# EAGLE board IOB-Adapter-Minimal_array (EAGLE 7.7.0)
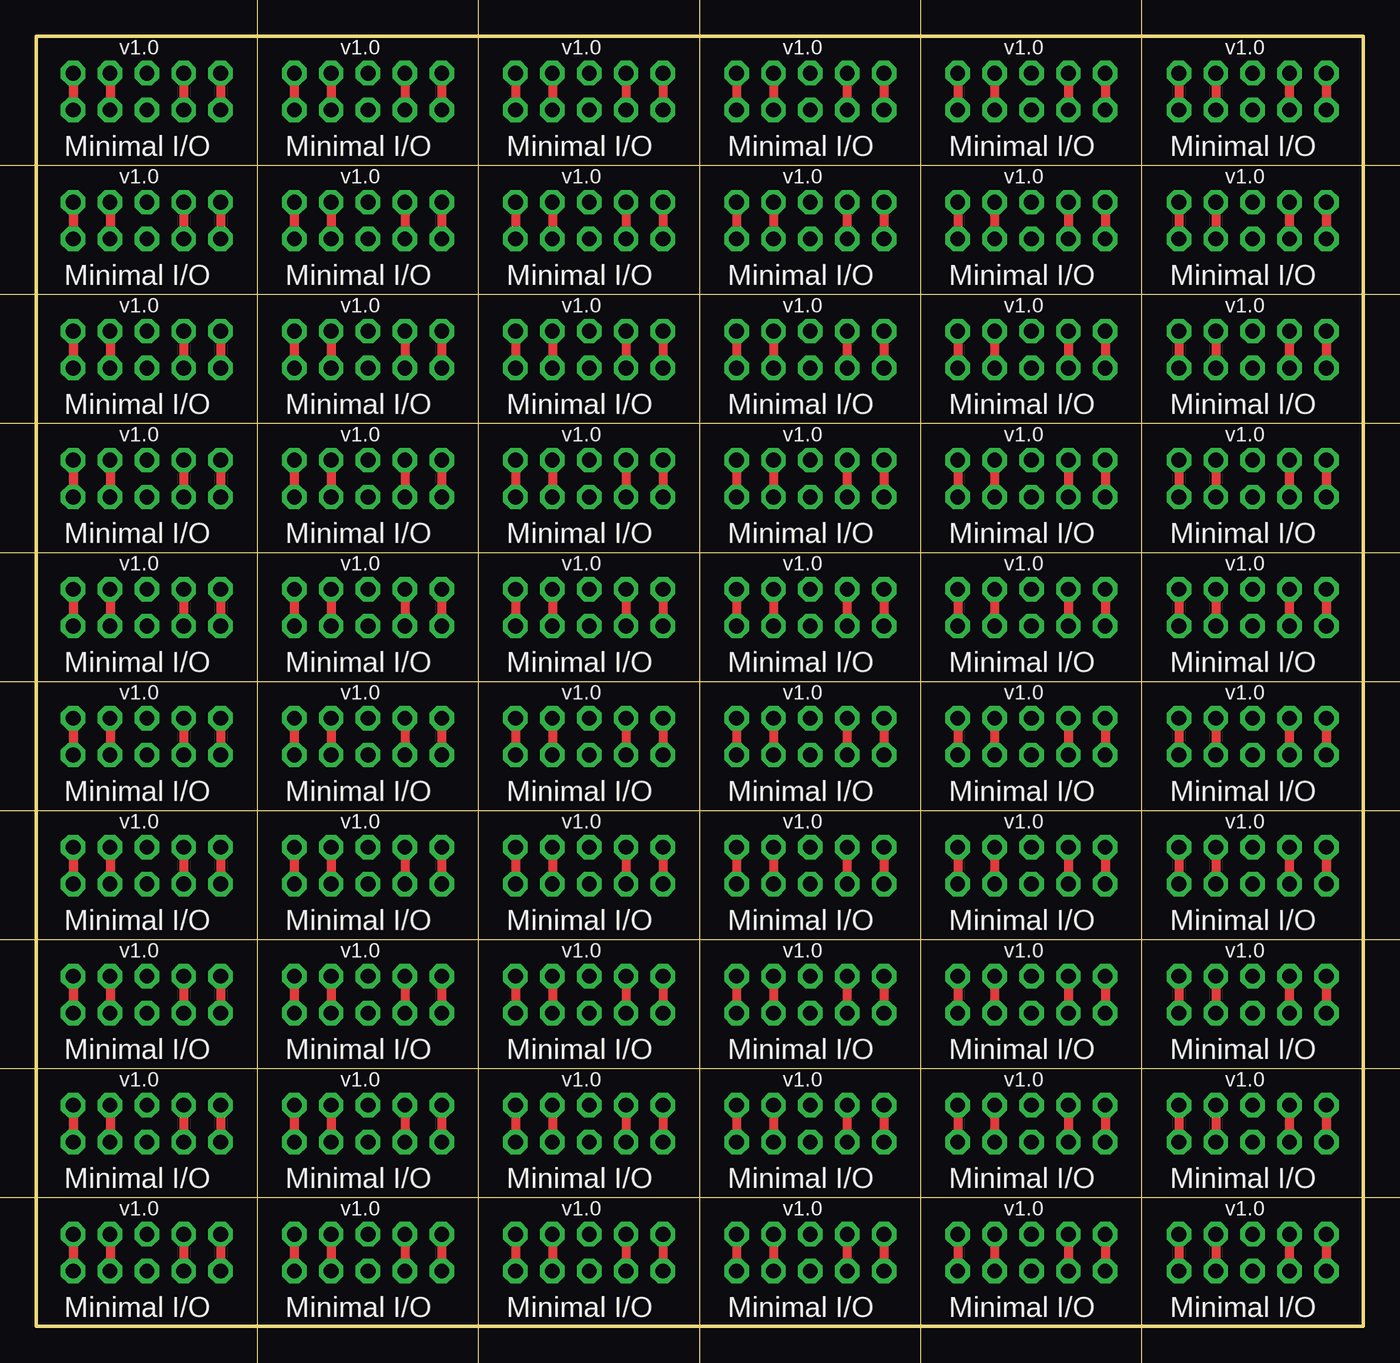
[diagram p0: board, top side]
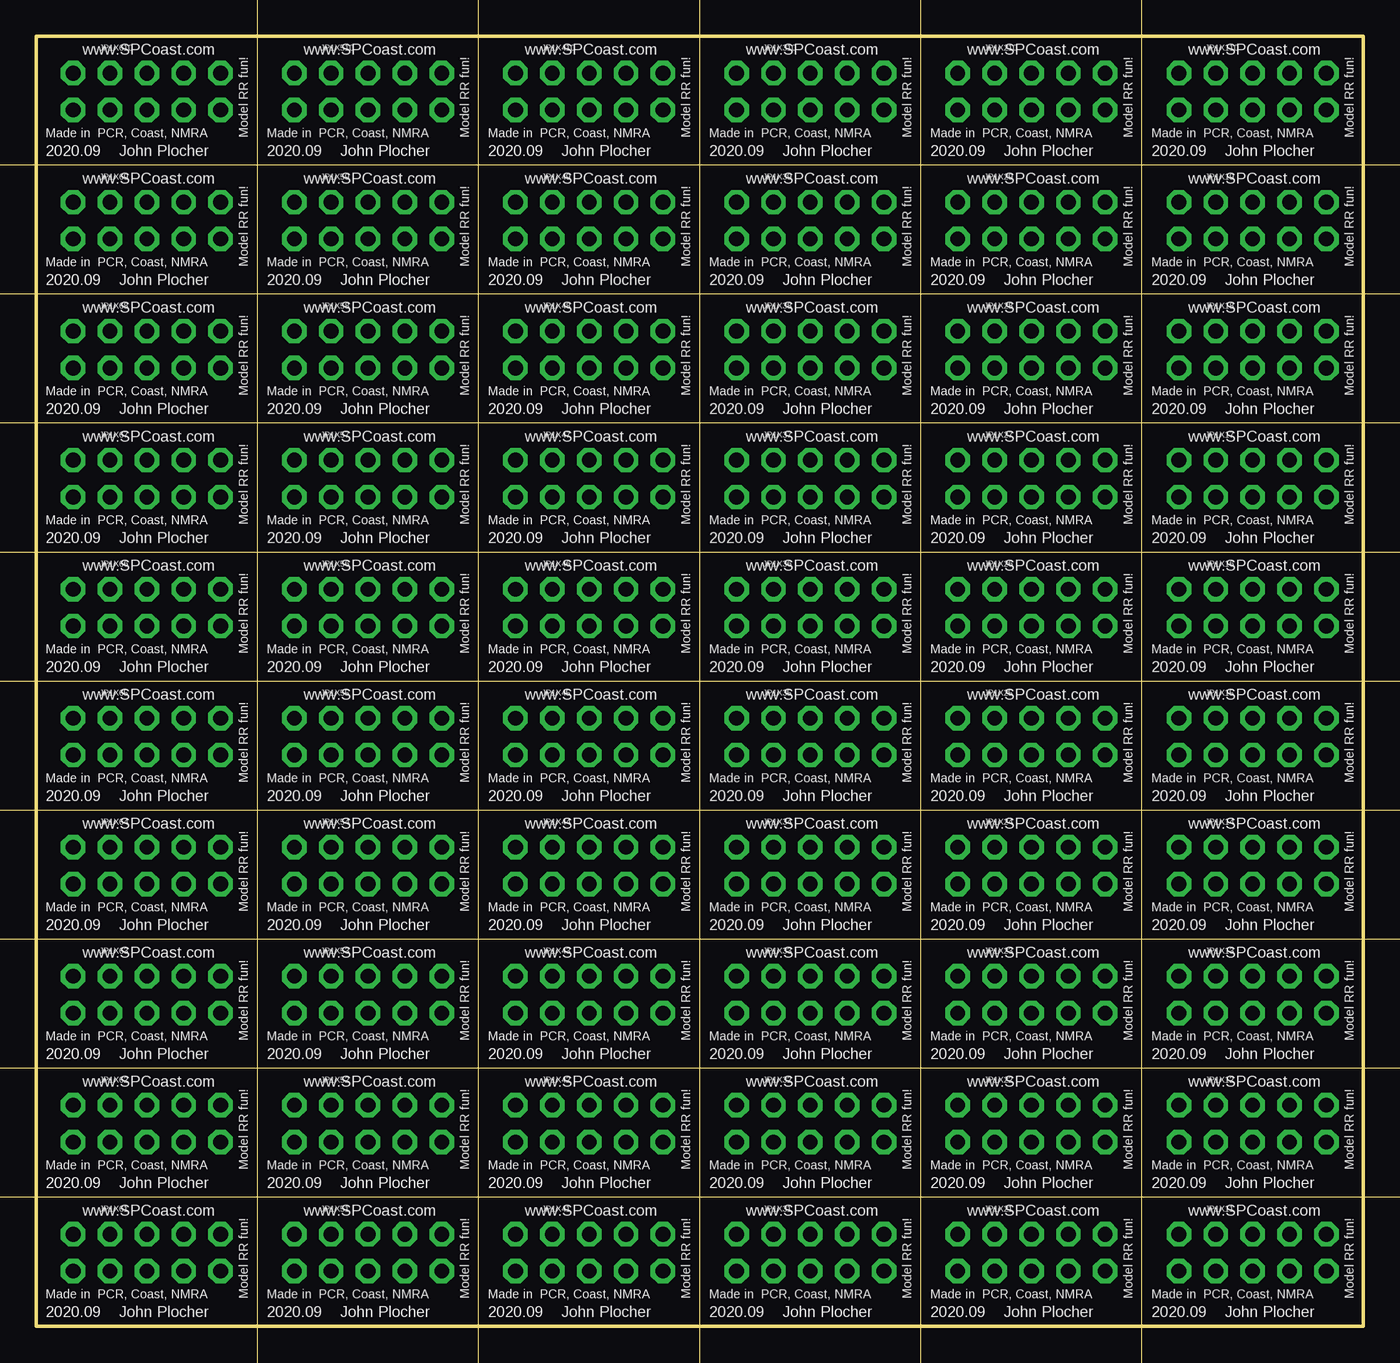
[diagram p1: board, bottom side, seen from below]

Size 91.44 x 88.9 mm. Coordinates in mm from the lower left corner, seen from the top.
Outline: 0,0 91.44,0 91.44,88.9 0,88.9 0,0
Copper layers (1*16): Top 0.035mm / dielectric 1.5mm / Bottom 0.035mm
Design rules "default": minimum track width 10mil, minimum drill 0.6mm, track to track 8mil, track to pad 8mil, pad to pad 8mil, via to via 8mil, smd to smd 8mil, copper to edge 40mil, drill to drill 8mil, minimum pad ring 10mil, minimum via ring 8mil, stop-mask expansion 4mil, vias tented up to drill 0mil, thermal gap 10mil
Milling: 14 lines

## Footprints (pad centres in the part's own frame; a part is rotated, then mirrored left to right if it is on the bottom)
2X5_NOSILK = drill 1.016 pad 1.676 octagon: 1 -1.27,5.08; 2 1.27,5.08; 3 -1.27,2.54; 4 1.27,2.54; 5 -1.27,0; 6 1.27,0; 7 -1.27,-2.54; 8 1.27,-2.54; 9 -1.27,-5.08; 10 1.27,-5.08

## Placement (x,y rotation side)
JP1X11  0.100  [2X5_NOSILK]  7.62,5.08 270 bottom
JP1X12  0.100  [2X5_NOSILK]  7.62,13.97 270 bottom
JP1X13  0.100  [2X5_NOSILK]  7.62,22.86 270 bottom
JP1X14  0.100  [2X5_NOSILK]  7.62,31.75 270 bottom
JP1X15  0.100  [2X5_NOSILK]  7.62,40.64 270 bottom
JP1X16  0.100  [2X5_NOSILK]  7.62,49.53 270 bottom
JP1X17  0.100  [2X5_NOSILK]  7.62,58.42 270 bottom
JP1X18  0.100  [2X5_NOSILK]  7.62,67.31 270 bottom
JP1X19  0.100  [2X5_NOSILK]  7.62,76.2 270 bottom
JP1X21  0.100  [2X5_NOSILK]  22.86,5.08 270 bottom
JP1X22  0.100  [2X5_NOSILK]  22.86,13.97 270 bottom
JP1X23  0.100  [2X5_NOSILK]  22.86,22.86 270 bottom
JP1X24  0.100  [2X5_NOSILK]  22.86,31.75 270 bottom
JP1X25  0.100  [2X5_NOSILK]  22.86,40.64 270 bottom
JP1X26  0.100  [2X5_NOSILK]  22.86,49.53 270 bottom
JP1X27  0.100  [2X5_NOSILK]  22.86,58.42 270 bottom
JP1X28  0.100  [2X5_NOSILK]  22.86,67.31 270 bottom
JP1X29  0.100  [2X5_NOSILK]  22.86,76.2 270 bottom
JP1X31  0.100  [2X5_NOSILK]  38.1,5.08 270 bottom
JP1X32  0.100  [2X5_NOSILK]  38.1,13.97 270 bottom
JP1X33  0.100  [2X5_NOSILK]  38.1,22.86 270 bottom
JP1X34  0.100  [2X5_NOSILK]  38.1,31.75 270 bottom
JP1X35  0.100  [2X5_NOSILK]  38.1,40.64 270 bottom
JP1X36  0.100  [2X5_NOSILK]  38.1,49.53 270 bottom
JP1X37  0.100  [2X5_NOSILK]  38.1,58.42 270 bottom
JP1X38  0.100  [2X5_NOSILK]  38.1,67.31 270 bottom
JP1X39  0.100  [2X5_NOSILK]  38.1,76.2 270 bottom
JP1X41  0.100  [2X5_NOSILK]  53.34,5.08 270 bottom
JP1X42  0.100  [2X5_NOSILK]  53.34,13.97 270 bottom
JP1X43  0.100  [2X5_NOSILK]  53.34,22.86 270 bottom
JP1X44  0.100  [2X5_NOSILK]  53.34,31.75 270 bottom
JP1X45  0.100  [2X5_NOSILK]  53.34,40.64 270 bottom
JP1X46  0.100  [2X5_NOSILK]  53.34,49.53 270 bottom
JP1X47  0.100  [2X5_NOSILK]  53.34,58.42 270 bottom
JP1X48  0.100  [2X5_NOSILK]  53.34,67.31 270 bottom
JP1X49  0.100  [2X5_NOSILK]  53.34,76.2 270 bottom
JP1X51  0.100  [2X5_NOSILK]  68.58,5.08 270 bottom
JP1X52  0.100  [2X5_NOSILK]  68.58,13.97 270 bottom
JP1X53  0.100  [2X5_NOSILK]  68.58,22.86 270 bottom
JP1X54  0.100  [2X5_NOSILK]  68.58,31.75 270 bottom
JP1X55  0.100  [2X5_NOSILK]  68.58,40.64 270 bottom
JP1X56  0.100  [2X5_NOSILK]  68.58,49.53 270 bottom
JP1X57  0.100  [2X5_NOSILK]  68.58,58.42 270 bottom
JP1X58  0.100  [2X5_NOSILK]  68.58,67.31 270 bottom
JP1X59  0.100  [2X5_NOSILK]  68.58,76.2 270 bottom
JP1X61  0.100  [2X5_NOSILK]  83.82,5.08 270 bottom
JP1X62  0.100  [2X5_NOSILK]  83.82,13.97 270 bottom
JP1X63  0.100  [2X5_NOSILK]  83.82,22.86 270 bottom
JP1X64  0.100  [2X5_NOSILK]  83.82,31.75 270 bottom
JP1X65  0.100  [2X5_NOSILK]  83.82,40.64 270 bottom
JP1X66  0.100  [2X5_NOSILK]  83.82,49.53 270 bottom
JP1X67  0.100  [2X5_NOSILK]  83.82,58.42 270 bottom
JP1X68  0.100  [2X5_NOSILK]  83.82,67.31 270 bottom
JP1X69  0.100  [2X5_NOSILK]  83.82,76.2 270 bottom
JP1X110  0.100  [2X5_NOSILK]  7.62,85.09 270 bottom
JP1X210  0.100  [2X5_NOSILK]  22.86,85.09 270 bottom
JP1X310  0.100  [2X5_NOSILK]  38.1,85.09 270 bottom
JP1X410  0.100  [2X5_NOSILK]  53.34,85.09 270 bottom
JP1X510  0.100  [2X5_NOSILK]  68.58,85.09 270 bottom
JP1X610  0.100  [2X5_NOSILK]  83.82,85.09 270 bottom

## Library data of the parts
JP1X11-JP1X19 JP1X21-JP1X29 JP1X31-JP1X39 JP1X41-JP1X49 JP1X51-JP1X59 JP1X61-JP1X69 JP1X110 JP1X210 JP1X310 JP1X410 JP1X510 JP1X610 = SPCoast

## Nets
N$1X11: JP1X11.1 JP1X11.2
N$1X12: JP1X12.1 JP1X12.2
N$1X13: JP1X13.1 JP1X13.2
N$1X14: JP1X14.1 JP1X14.2
N$1X15: JP1X15.1 JP1X15.2
N$1X16: JP1X16.1 JP1X16.2
N$1X17: JP1X17.1 JP1X17.2
N$1X18: JP1X18.1 JP1X18.2
N$1X19: JP1X19.1 JP1X19.2
N$1X21: JP1X21.1 JP1X21.2
N$1X22: JP1X22.1 JP1X22.2
N$1X23: JP1X23.1 JP1X23.2
N$1X24: JP1X24.1 JP1X24.2
N$1X25: JP1X25.1 JP1X25.2
N$1X26: JP1X26.1 JP1X26.2
N$1X27: JP1X27.1 JP1X27.2
N$1X28: JP1X28.1 JP1X28.2
N$1X29: JP1X29.1 JP1X29.2
N$1X31: JP1X31.1 JP1X31.2
N$1X32: JP1X32.1 JP1X32.2
N$1X33: JP1X33.1 JP1X33.2
N$1X34: JP1X34.1 JP1X34.2
N$1X35: JP1X35.1 JP1X35.2
N$1X36: JP1X36.1 JP1X36.2
N$1X37: JP1X37.1 JP1X37.2
N$1X38: JP1X38.1 JP1X38.2
N$1X39: JP1X39.1 JP1X39.2
N$1X41: JP1X41.1 JP1X41.2
N$1X42: JP1X42.1 JP1X42.2
N$1X43: JP1X43.1 JP1X43.2
N$1X44: JP1X44.1 JP1X44.2
N$1X45: JP1X45.1 JP1X45.2
N$1X46: JP1X46.1 JP1X46.2
N$1X47: JP1X47.1 JP1X47.2
N$1X48: JP1X48.1 JP1X48.2
N$1X49: JP1X49.1 JP1X49.2
N$1X51: JP1X51.1 JP1X51.2
N$1X52: JP1X52.1 JP1X52.2
N$1X53: JP1X53.1 JP1X53.2
N$1X54: JP1X54.1 JP1X54.2
N$1X55: JP1X55.1 JP1X55.2
N$1X56: JP1X56.1 JP1X56.2
N$1X57: JP1X57.1 JP1X57.2
N$1X58: JP1X58.1 JP1X58.2
N$1X59: JP1X59.1 JP1X59.2
N$1X61: JP1X61.1 JP1X61.2
N$1X62: JP1X62.1 JP1X62.2
N$1X63: JP1X63.1 JP1X63.2
N$1X64: JP1X64.1 JP1X64.2
N$1X65: JP1X65.1 JP1X65.2
N$1X66: JP1X66.1 JP1X66.2
N$1X67: JP1X67.1 JP1X67.2
N$1X68: JP1X68.1 JP1X68.2
N$1X69: JP1X69.1 JP1X69.2
N$1X110: JP1X110.1 JP1X110.2
N$1X210: JP1X210.1 JP1X210.2
N$1X310: JP1X310.1 JP1X310.2
N$1X410: JP1X410.1 JP1X410.2
N$1X510: JP1X510.1 JP1X510.2
N$1X610: JP1X610.1 JP1X610.2
N$2X11: JP1X11.3 JP1X11.4
N$2X12: JP1X12.3 JP1X12.4
N$2X13: JP1X13.3 JP1X13.4
N$2X14: JP1X14.3 JP1X14.4
N$2X15: JP1X15.3 JP1X15.4
N$2X16: JP1X16.3 JP1X16.4
N$2X17: JP1X17.3 JP1X17.4
N$2X18: JP1X18.3 JP1X18.4
N$2X19: JP1X19.3 JP1X19.4
N$2X21: JP1X21.3 JP1X21.4
N$2X22: JP1X22.3 JP1X22.4
N$2X23: JP1X23.3 JP1X23.4
N$2X24: JP1X24.3 JP1X24.4
N$2X25: JP1X25.3 JP1X25.4
N$2X26: JP1X26.3 JP1X26.4
N$2X27: JP1X27.3 JP1X27.4
N$2X28: JP1X28.3 JP1X28.4
N$2X29: JP1X29.3 JP1X29.4
N$2X31: JP1X31.3 JP1X31.4
N$2X32: JP1X32.3 JP1X32.4
N$2X33: JP1X33.3 JP1X33.4
N$2X34: JP1X34.3 JP1X34.4
N$2X35: JP1X35.3 JP1X35.4
N$2X36: JP1X36.3 JP1X36.4
N$2X37: JP1X37.3 JP1X37.4
N$2X38: JP1X38.3 JP1X38.4
N$2X39: JP1X39.3 JP1X39.4
N$2X41: JP1X41.3 JP1X41.4
N$2X42: JP1X42.3 JP1X42.4
N$2X43: JP1X43.3 JP1X43.4
N$2X44: JP1X44.3 JP1X44.4
N$2X45: JP1X45.3 JP1X45.4
N$2X46: JP1X46.3 JP1X46.4
N$2X47: JP1X47.3 JP1X47.4
N$2X48: JP1X48.3 JP1X48.4
N$2X49: JP1X49.3 JP1X49.4
N$2X51: JP1X51.3 JP1X51.4
N$2X52: JP1X52.3 JP1X52.4
N$2X53: JP1X53.3 JP1X53.4
N$2X54: JP1X54.3 JP1X54.4
N$2X55: JP1X55.3 JP1X55.4
N$2X56: JP1X56.3 JP1X56.4
N$2X57: JP1X57.3 JP1X57.4
N$2X58: JP1X58.3 JP1X58.4
N$2X59: JP1X59.3 JP1X59.4
N$2X61: JP1X61.3 JP1X61.4
N$2X62: JP1X62.3 JP1X62.4
N$2X63: JP1X63.3 JP1X63.4
N$2X64: JP1X64.3 JP1X64.4
N$2X65: JP1X65.3 JP1X65.4
N$2X66: JP1X66.3 JP1X66.4
N$2X67: JP1X67.3 JP1X67.4
N$2X68: JP1X68.3 JP1X68.4
N$2X69: JP1X69.3 JP1X69.4
N$2X110: JP1X110.3 JP1X110.4
N$2X210: JP1X210.3 JP1X210.4
N$2X310: JP1X310.3 JP1X310.4
N$2X410: JP1X410.3 JP1X410.4
N$2X510: JP1X510.3 JP1X510.4
N$2X610: JP1X610.3 JP1X610.4
N$4X11: JP1X11.7 JP1X11.8
N$4X12: JP1X12.7 JP1X12.8
N$4X13: JP1X13.7 JP1X13.8
N$4X14: JP1X14.7 JP1X14.8
N$4X15: JP1X15.7 JP1X15.8
N$4X16: JP1X16.7 JP1X16.8
N$4X17: JP1X17.7 JP1X17.8
N$4X18: JP1X18.7 JP1X18.8
N$4X19: JP1X19.7 JP1X19.8
N$4X21: JP1X21.7 JP1X21.8
N$4X22: JP1X22.7 JP1X22.8
N$4X23: JP1X23.7 JP1X23.8
N$4X24: JP1X24.7 JP1X24.8
N$4X25: JP1X25.7 JP1X25.8
N$4X26: JP1X26.7 JP1X26.8
N$4X27: JP1X27.7 JP1X27.8
N$4X28: JP1X28.7 JP1X28.8
N$4X29: JP1X29.7 JP1X29.8
N$4X31: JP1X31.7 JP1X31.8
N$4X32: JP1X32.7 JP1X32.8
N$4X33: JP1X33.7 JP1X33.8
N$4X34: JP1X34.7 JP1X34.8
N$4X35: JP1X35.7 JP1X35.8
N$4X36: JP1X36.7 JP1X36.8
N$4X37: JP1X37.7 JP1X37.8
N$4X38: JP1X38.7 JP1X38.8
N$4X39: JP1X39.7 JP1X39.8
N$4X41: JP1X41.7 JP1X41.8
N$4X42: JP1X42.7 JP1X42.8
N$4X43: JP1X43.7 JP1X43.8
N$4X44: JP1X44.7 JP1X44.8
N$4X45: JP1X45.7 JP1X45.8
N$4X46: JP1X46.7 JP1X46.8
N$4X47: JP1X47.7 JP1X47.8
N$4X48: JP1X48.7 JP1X48.8
N$4X49: JP1X49.7 JP1X49.8
N$4X51: JP1X51.7 JP1X51.8
N$4X52: JP1X52.7 JP1X52.8
N$4X53: JP1X53.7 JP1X53.8
N$4X54: JP1X54.7 JP1X54.8
N$4X55: JP1X55.7 JP1X55.8
N$4X56: JP1X56.7 JP1X56.8
N$4X57: JP1X57.7 JP1X57.8
N$4X58: JP1X58.7 JP1X58.8
N$4X59: JP1X59.7 JP1X59.8
N$4X61: JP1X61.7 JP1X61.8
N$4X62: JP1X62.7 JP1X62.8
N$4X63: JP1X63.7 JP1X63.8
N$4X64: JP1X64.7 JP1X64.8
N$4X65: JP1X65.7 JP1X65.8
N$4X66: JP1X66.7 JP1X66.8
N$4X67: JP1X67.7 JP1X67.8
N$4X68: JP1X68.7 JP1X68.8
N$4X69: JP1X69.7 JP1X69.8
N$4X110: JP1X110.7 JP1X110.8
N$4X210: JP1X210.7 JP1X210.8
N$4X310: JP1X310.7 JP1X310.8
N$4X410: JP1X410.7 JP1X410.8
N$4X510: JP1X510.7 JP1X510.8
N$4X610: JP1X610.7 JP1X610.8
N$5X11: JP1X11.9 JP1X11.10
N$5X12: JP1X12.9 JP1X12.10
N$5X13: JP1X13.9 JP1X13.10
N$5X14: JP1X14.9 JP1X14.10
N$5X15: JP1X15.9 JP1X15.10
N$5X16: JP1X16.9 JP1X16.10
N$5X17: JP1X17.9 JP1X17.10
N$5X18: JP1X18.9 JP1X18.10
N$5X19: JP1X19.9 JP1X19.10
N$5X21: JP1X21.9 JP1X21.10
N$5X22: JP1X22.9 JP1X22.10
N$5X23: JP1X23.9 JP1X23.10
N$5X24: JP1X24.9 JP1X24.10
N$5X25: JP1X25.9 JP1X25.10
N$5X26: JP1X26.9 JP1X26.10
N$5X27: JP1X27.9 JP1X27.10
N$5X28: JP1X28.9 JP1X28.10
N$5X29: JP1X29.9 JP1X29.10
N$5X31: JP1X31.9 JP1X31.10
N$5X32: JP1X32.9 JP1X32.10
N$5X33: JP1X33.9 JP1X33.10
N$5X34: JP1X34.9 JP1X34.10
N$5X35: JP1X35.9 JP1X35.10
N$5X36: JP1X36.9 JP1X36.10
N$5X37: JP1X37.9 JP1X37.10
N$5X38: JP1X38.9 JP1X38.10
N$5X39: JP1X39.9 JP1X39.10
N$5X41: JP1X41.9 JP1X41.10
N$5X42: JP1X42.9 JP1X42.10
N$5X43: JP1X43.9 JP1X43.10
N$5X44: JP1X44.9 JP1X44.10
N$5X45: JP1X45.9 JP1X45.10
N$5X46: JP1X46.9 JP1X46.10
N$5X47: JP1X47.9 JP1X47.10
N$5X48: JP1X48.9 JP1X48.10
N$5X49: JP1X49.9 JP1X49.10
N$5X51: JP1X51.9 JP1X51.10
N$5X52: JP1X52.9 JP1X52.10
N$5X53: JP1X53.9 JP1X53.10
N$5X54: JP1X54.9 JP1X54.10
N$5X55: JP1X55.9 JP1X55.10
N$5X56: JP1X56.9 JP1X56.10
N$5X57: JP1X57.9 JP1X57.10
N$5X58: JP1X58.9 JP1X58.10
N$5X59: JP1X59.9 JP1X59.10
N$5X61: JP1X61.9 JP1X61.10
N$5X62: JP1X62.9 JP1X62.10
N$5X63: JP1X63.9 JP1X63.10
N$5X64: JP1X64.9 JP1X64.10
N$5X65: JP1X65.9 JP1X65.10
N$5X66: JP1X66.9 JP1X66.10
N$5X67: JP1X67.9 JP1X67.10
N$5X68: JP1X68.9 JP1X68.10
N$5X69: JP1X69.9 JP1X69.10
N$5X110: JP1X110.9 JP1X110.10
N$5X210: JP1X210.9 JP1X210.10
N$5X310: JP1X310.9 JP1X310.10
N$5X410: JP1X410.9 JP1X410.10
N$5X510: JP1X510.9 JP1X510.10
N$5X610: JP1X610.9 JP1X610.10

## Tracks (layer width: path | path; a pad name or v marks a point on that pad's centre or on a via)
N$1X11
  Top 0.61: JP1X11.1 JP1X11.2
N$1X12
  Top 0.61: JP1X12.1 JP1X12.2
N$1X13
  Top 0.61: JP1X13.1 JP1X13.2
N$1X14
  Top 0.61: JP1X14.1 JP1X14.2
N$1X15
  Top 0.61: JP1X15.1 JP1X15.2
N$1X16
  Top 0.61: JP1X16.1 JP1X16.2
N$1X17
  Top 0.61: JP1X17.1 JP1X17.2
N$1X18
  Top 0.61: JP1X18.1 JP1X18.2
N$1X19
  Top 0.61: JP1X19.1 JP1X19.2
N$1X21
  Top 0.61: JP1X21.1 JP1X21.2
N$1X22
  Top 0.61: JP1X22.1 JP1X22.2
N$1X23
  Top 0.61: JP1X23.1 JP1X23.2
N$1X24
  Top 0.61: JP1X24.1 JP1X24.2
N$1X25
  Top 0.61: JP1X25.1 JP1X25.2
N$1X26
  Top 0.61: JP1X26.1 JP1X26.2
N$1X27
  Top 0.61: JP1X27.1 JP1X27.2
N$1X28
  Top 0.61: JP1X28.1 JP1X28.2
N$1X29
  Top 0.61: JP1X29.1 JP1X29.2
N$1X31
  Top 0.61: JP1X31.1 JP1X31.2
N$1X32
  Top 0.61: JP1X32.1 JP1X32.2
N$1X33
  Top 0.61: JP1X33.1 JP1X33.2
N$1X34
  Top 0.61: JP1X34.1 JP1X34.2
N$1X35
  Top 0.61: JP1X35.1 JP1X35.2
N$1X36
  Top 0.61: JP1X36.1 JP1X36.2
N$1X37
  Top 0.61: JP1X37.1 JP1X37.2
N$1X38
  Top 0.61: JP1X38.1 JP1X38.2
N$1X39
  Top 0.61: JP1X39.1 JP1X39.2
N$1X41
  Top 0.61: JP1X41.1 JP1X41.2
N$1X42
  Top 0.61: JP1X42.1 JP1X42.2
N$1X43
  Top 0.61: JP1X43.1 JP1X43.2
N$1X44
  Top 0.61: JP1X44.1 JP1X44.2
N$1X45
  Top 0.61: JP1X45.1 JP1X45.2
N$1X46
  Top 0.61: JP1X46.1 JP1X46.2
N$1X47
  Top 0.61: JP1X47.1 JP1X47.2
N$1X48
  Top 0.61: JP1X48.1 JP1X48.2
N$1X49
  Top 0.61: JP1X49.1 JP1X49.2
N$1X51
  Top 0.61: JP1X51.1 JP1X51.2
N$1X52
  Top 0.61: JP1X52.1 JP1X52.2
N$1X53
  Top 0.61: JP1X53.1 JP1X53.2
N$1X54
  Top 0.61: JP1X54.1 JP1X54.2
N$1X55
  Top 0.61: JP1X55.1 JP1X55.2
N$1X56
  Top 0.61: JP1X56.1 JP1X56.2
N$1X57
  Top 0.61: JP1X57.1 JP1X57.2
N$1X58
  Top 0.61: JP1X58.1 JP1X58.2
N$1X59
  Top 0.61: JP1X59.1 JP1X59.2
N$1X61
  Top 0.61: JP1X61.1 JP1X61.2
N$1X62
  Top 0.61: JP1X62.1 JP1X62.2
N$1X63
  Top 0.61: JP1X63.1 JP1X63.2
N$1X64
  Top 0.61: JP1X64.1 JP1X64.2
N$1X65
  Top 0.61: JP1X65.1 JP1X65.2
N$1X66
  Top 0.61: JP1X66.1 JP1X66.2
N$1X67
  Top 0.61: JP1X67.1 JP1X67.2
N$1X68
  Top 0.61: JP1X68.1 JP1X68.2
N$1X69
  Top 0.61: JP1X69.1 JP1X69.2
N$1X110
  Top 0.61: JP1X110.1 JP1X110.2
N$1X210
  Top 0.61: JP1X210.1 JP1X210.2
N$1X310
  Top 0.61: JP1X310.1 JP1X310.2
N$1X410
  Top 0.61: JP1X410.1 JP1X410.2
N$1X510
  Top 0.61: JP1X510.1 JP1X510.2
N$1X610
  Top 0.61: JP1X610.1 JP1X610.2
N$2X11
  Top 0.61: JP1X11.3 JP1X11.4
N$2X12
  Top 0.61: JP1X12.3 JP1X12.4
N$2X13
  Top 0.61: JP1X13.3 JP1X13.4
N$2X14
  Top 0.61: JP1X14.3 JP1X14.4
N$2X15
  Top 0.61: JP1X15.3 JP1X15.4
N$2X16
  Top 0.61: JP1X16.3 JP1X16.4
N$2X17
  Top 0.61: JP1X17.3 JP1X17.4
N$2X18
  Top 0.61: JP1X18.3 JP1X18.4
N$2X19
  Top 0.61: JP1X19.3 JP1X19.4
N$2X21
  Top 0.61: JP1X21.3 JP1X21.4
N$2X22
  Top 0.61: JP1X22.3 JP1X22.4
N$2X23
  Top 0.61: JP1X23.3 JP1X23.4
N$2X24
  Top 0.61: JP1X24.3 JP1X24.4
N$2X25
  Top 0.61: JP1X25.3 JP1X25.4
N$2X26
  Top 0.61: JP1X26.3 JP1X26.4
N$2X27
  Top 0.61: JP1X27.3 JP1X27.4
N$2X28
  Top 0.61: JP1X28.3 JP1X28.4
N$2X29
  Top 0.61: JP1X29.3 JP1X29.4
N$2X31
  Top 0.61: JP1X31.3 JP1X31.4
N$2X32
  Top 0.61: JP1X32.3 JP1X32.4
N$2X33
  Top 0.61: JP1X33.3 JP1X33.4
N$2X34
  Top 0.61: JP1X34.3 JP1X34.4
N$2X35
  Top 0.61: JP1X35.3 JP1X35.4
N$2X36
  Top 0.61: JP1X36.3 JP1X36.4
N$2X37
  Top 0.61: JP1X37.3 JP1X37.4
N$2X38
  Top 0.61: JP1X38.3 JP1X38.4
N$2X39
  Top 0.61: JP1X39.3 JP1X39.4
N$2X41
  Top 0.61: JP1X41.3 JP1X41.4
N$2X42
  Top 0.61: JP1X42.3 JP1X42.4
N$2X43
  Top 0.61: JP1X43.3 JP1X43.4
N$2X44
  Top 0.61: JP1X44.3 JP1X44.4
N$2X45
  Top 0.61: JP1X45.3 JP1X45.4
N$2X46
  Top 0.61: JP1X46.3 JP1X46.4
N$2X47
  Top 0.61: JP1X47.3 JP1X47.4
N$2X48
  Top 0.61: JP1X48.3 JP1X48.4
N$2X49
  Top 0.61: JP1X49.3 JP1X49.4
N$2X51
  Top 0.61: JP1X51.3 JP1X51.4
N$2X52
  Top 0.61: JP1X52.3 JP1X52.4
N$2X53
  Top 0.61: JP1X53.3 JP1X53.4
N$2X54
  Top 0.61: JP1X54.3 JP1X54.4
N$2X55
  Top 0.61: JP1X55.3 JP1X55.4
N$2X56
  Top 0.61: JP1X56.3 JP1X56.4
N$2X57
  Top 0.61: JP1X57.3 JP1X57.4
N$2X58
  Top 0.61: JP1X58.3 JP1X58.4
N$2X59
  Top 0.61: JP1X59.3 JP1X59.4
N$2X61
  Top 0.61: JP1X61.3 JP1X61.4
N$2X62
  Top 0.61: JP1X62.3 JP1X62.4
N$2X63
  Top 0.61: JP1X63.3 JP1X63.4
N$2X64
  Top 0.61: JP1X64.3 JP1X64.4
N$2X65
  Top 0.61: JP1X65.3 JP1X65.4
N$2X66
  Top 0.61: JP1X66.3 JP1X66.4
N$2X67
  Top 0.61: JP1X67.3 JP1X67.4
N$2X68
  Top 0.61: JP1X68.3 JP1X68.4
N$2X69
  Top 0.61: JP1X69.3 JP1X69.4
N$2X110
  Top 0.61: JP1X110.3 JP1X110.4
N$2X210
  Top 0.61: JP1X210.3 JP1X210.4
N$2X310
  Top 0.61: JP1X310.3 JP1X310.4
N$2X410
  Top 0.61: JP1X410.3 JP1X410.4
N$2X510
  Top 0.61: JP1X510.3 JP1X510.4
N$2X610
  Top 0.61: JP1X610.3 JP1X610.4
N$4X11
  Top 0.61: JP1X11.7 JP1X11.8
N$4X12
  Top 0.61: JP1X12.7 JP1X12.8
N$4X13
  Top 0.61: JP1X13.7 JP1X13.8
N$4X14
  Top 0.61: JP1X14.7 JP1X14.8
N$4X15
  Top 0.61: JP1X15.7 JP1X15.8
N$4X16
  Top 0.61: JP1X16.7 JP1X16.8
N$4X17
  Top 0.61: JP1X17.7 JP1X17.8
N$4X18
  Top 0.61: JP1X18.7 JP1X18.8
N$4X19
  Top 0.61: JP1X19.7 JP1X19.8
N$4X21
  Top 0.61: JP1X21.7 JP1X21.8
N$4X22
  Top 0.61: JP1X22.7 JP1X22.8
N$4X23
  Top 0.61: JP1X23.7 JP1X23.8
N$4X24
  Top 0.61: JP1X24.7 JP1X24.8
N$4X25
  Top 0.61: JP1X25.7 JP1X25.8
N$4X26
  Top 0.61: JP1X26.7 JP1X26.8
N$4X27
  Top 0.61: JP1X27.7 JP1X27.8
N$4X28
  Top 0.61: JP1X28.7 JP1X28.8
N$4X29
  Top 0.61: JP1X29.7 JP1X29.8
N$4X31
  Top 0.61: JP1X31.7 JP1X31.8
N$4X32
  Top 0.61: JP1X32.7 JP1X32.8
N$4X33
  Top 0.61: JP1X33.7 JP1X33.8
N$4X34
  Top 0.61: JP1X34.7 JP1X34.8
N$4X35
  Top 0.61: JP1X35.7 JP1X35.8
N$4X36
  Top 0.61: JP1X36.7 JP1X36.8
N$4X37
  Top 0.61: JP1X37.7 JP1X37.8
N$4X38
  Top 0.61: JP1X38.7 JP1X38.8
N$4X39
  Top 0.61: JP1X39.7 JP1X39.8
N$4X41
  Top 0.61: JP1X41.7 JP1X41.8
N$4X42
  Top 0.61: JP1X42.7 JP1X42.8
N$4X43
  Top 0.61: JP1X43.7 JP1X43.8
N$4X44
  Top 0.61: JP1X44.7 JP1X44.8
N$4X45
  Top 0.61: JP1X45.7 JP1X45.8
N$4X46
  Top 0.61: JP1X46.7 JP1X46.8
N$4X47
  Top 0.61: JP1X47.7 JP1X47.8
N$4X48
  Top 0.61: JP1X48.7 JP1X48.8
N$4X49
  Top 0.61: JP1X49.7 JP1X49.8
N$4X51
  Top 0.61: JP1X51.7 JP1X51.8
N$4X52
  Top 0.61: JP1X52.7 JP1X52.8
N$4X53
  Top 0.61: JP1X53.7 JP1X53.8
N$4X54
  Top 0.61: JP1X54.7 JP1X54.8
N$4X55
  Top 0.61: JP1X55.7 JP1X55.8
N$4X56
  Top 0.61: JP1X56.7 JP1X56.8
N$4X57
  Top 0.61: JP1X57.7 JP1X57.8
N$4X58
  Top 0.61: JP1X58.7 JP1X58.8
N$4X59
  Top 0.61: JP1X59.7 JP1X59.8
N$4X61
  Top 0.61: JP1X61.7 JP1X61.8
N$4X62
  Top 0.61: JP1X62.7 JP1X62.8
N$4X63
  Top 0.61: JP1X63.7 JP1X63.8
N$4X64
  Top 0.61: JP1X64.7 JP1X64.8
N$4X65
  Top 0.61: JP1X65.7 JP1X65.8
N$4X66
  Top 0.61: JP1X66.7 JP1X66.8
N$4X67
  Top 0.61: JP1X67.7 JP1X67.8
N$4X68
  Top 0.61: JP1X68.7 JP1X68.8
N$4X69
  Top 0.61: JP1X69.7 JP1X69.8
N$4X110
  Top 0.61: JP1X110.7 JP1X110.8
N$4X210
  Top 0.61: JP1X210.7 JP1X210.8
N$4X310
  Top 0.61: JP1X310.7 JP1X310.8
N$4X410
  Top 0.61: JP1X410.7 JP1X410.8
N$4X510
  Top 0.61: JP1X510.7 JP1X510.8
N$4X610
  Top 0.61: JP1X610.7 JP1X610.8
N$5X11
  Top 0.61: JP1X11.9 JP1X11.10
N$5X12
  Top 0.61: JP1X12.9 JP1X12.10
N$5X13
  Top 0.61: JP1X13.9 JP1X13.10
N$5X14
  Top 0.61: JP1X14.9 JP1X14.10
N$5X15
  Top 0.61: JP1X15.9 JP1X15.10
N$5X16
  Top 0.61: JP1X16.9 JP1X16.10
N$5X17
  Top 0.61: JP1X17.9 JP1X17.10
N$5X18
  Top 0.61: JP1X18.9 JP1X18.10
N$5X19
  Top 0.61: JP1X19.9 JP1X19.10
N$5X21
  Top 0.61: JP1X21.9 JP1X21.10
N$5X22
  Top 0.61: JP1X22.9 JP1X22.10
N$5X23
  Top 0.61: JP1X23.9 JP1X23.10
N$5X24
  Top 0.61: JP1X24.9 JP1X24.10
N$5X25
  Top 0.61: JP1X25.9 JP1X25.10
N$5X26
  Top 0.61: JP1X26.9 JP1X26.10
N$5X27
  Top 0.61: JP1X27.9 JP1X27.10
N$5X28
  Top 0.61: JP1X28.9 JP1X28.10
N$5X29
  Top 0.61: JP1X29.9 JP1X29.10
N$5X31
  Top 0.61: JP1X31.9 JP1X31.10
N$5X32
  Top 0.61: JP1X32.9 JP1X32.10
N$5X33
  Top 0.61: JP1X33.9 JP1X33.10
N$5X34
  Top 0.61: JP1X34.9 JP1X34.10
N$5X35
  Top 0.61: JP1X35.9 JP1X35.10
N$5X36
  Top 0.61: JP1X36.9 JP1X36.10
N$5X37
  Top 0.61: JP1X37.9 JP1X37.10
N$5X38
  Top 0.61: JP1X38.9 JP1X38.10
N$5X39
  Top 0.61: JP1X39.9 JP1X39.10
N$5X41
  Top 0.61: JP1X41.9 JP1X41.10
N$5X42
  Top 0.61: JP1X42.9 JP1X42.10
N$5X43
  Top 0.61: JP1X43.9 JP1X43.10
N$5X44
  Top 0.61: JP1X44.9 JP1X44.10
N$5X45
  Top 0.61: JP1X45.9 JP1X45.10
N$5X46
  Top 0.61: JP1X46.9 JP1X46.10
N$5X47
  Top 0.61: JP1X47.9 JP1X47.10
N$5X48
  Top 0.61: JP1X48.9 JP1X48.10
N$5X49
  Top 0.61: JP1X49.9 JP1X49.10
N$5X51
  Top 0.61: JP1X51.9 JP1X51.10
N$5X52
  Top 0.61: JP1X52.9 JP1X52.10
N$5X53
  Top 0.61: JP1X53.9 JP1X53.10
N$5X54
  Top 0.61: JP1X54.9 JP1X54.10
N$5X55
  Top 0.61: JP1X55.9 JP1X55.10
N$5X56
  Top 0.61: JP1X56.9 JP1X56.10
N$5X57
  Top 0.61: JP1X57.9 JP1X57.10
N$5X58
  Top 0.61: JP1X58.9 JP1X58.10
N$5X59
  Top 0.61: JP1X59.9 JP1X59.10
N$5X61
  Top 0.61: JP1X61.9 JP1X61.10
N$5X62
  Top 0.61: JP1X62.9 JP1X62.10
N$5X63
  Top 0.61: JP1X63.9 JP1X63.10
N$5X64
  Top 0.61: JP1X64.9 JP1X64.10
N$5X65
  Top 0.61: JP1X65.9 JP1X65.10
N$5X66
  Top 0.61: JP1X66.9 JP1X66.10
N$5X67
  Top 0.61: JP1X67.9 JP1X67.10
N$5X68
  Top 0.61: JP1X68.9 JP1X68.10
N$5X69
  Top 0.61: JP1X69.9 JP1X69.10
N$5X110
  Top 0.61: JP1X110.9 JP1X110.10
N$5X210
  Top 0.61: JP1X210.9 JP1X210.10
N$5X310
  Top 0.61: JP1X310.9 JP1X310.10
N$5X410
  Top 0.61: JP1X410.9 JP1X410.10
N$5X510
  Top 0.61: JP1X510.9 JP1X510.10
N$5X610
  Top 0.61: JP1X610.9 JP1X610.10

## Text on the board
tPlace: v1.0 | v1.0 | v1.0 | v1.0 | v1.0 | v1.0 | Minimal I/O | Minimal I/O | Minimal I/O | Minimal I/O | Minimal I/O | Minimal I/O | v1.0 | v1.0 | v1.0 | v1.0 | v1.0 | v1.0 | Minimal I/O | Minimal I/O | Minimal I/O | Minimal I/O | Minimal I/O | Minimal I/O | v1.0 | v1.0 | v1.0 | v1.0 | v1.0 | v1.0 | Minimal I/O | Minimal I/O | Minimal I/O | Minimal I/O | Minimal I/O | Minimal I/O | v1.0 | v1.0 | v1.0 | v1.0 | v1.0 | v1.0 | Minimal I/O | Minimal I/O | Minimal I/O | Minimal I/O | Minimal I/O | Minimal I/O | v1.0 | v1.0 | v1.0 | v1.0 | v1.0 | v1.0 | Minimal I/O | Minimal I/O | Minimal I/O | Minimal I/O | Minimal I/O | Minimal I/O | v1.0 | v1.0 | v1.0 | v1.0 | v1.0 | v1.0 | Minimal I/O | Minimal I/O | Minimal I/O | Minimal I/O | Minimal I/O | Minimal I/O | v1.0 | v1.0 | v1.0 | v1.0 | v1.0 | v1.0 | Minimal I/O | Minimal I/O | Minimal I/O | Minimal I/O | Minimal I/O | Minimal I/O | v1.0 | v1.0 | v1.0 | v1.0 | v1.0 | v1.0 | Minimal I/O | Minimal I/O | Minimal I/O | Minimal I/O | Minimal I/O | Minimal I/O | v1.0 | v1.0 | v1.0 | v1.0 | v1.0 | v1.0 | Minimal I/O | Minimal I/O | Minimal I/O | Minimal I/O | Minimal I/O | Minimal I/O | v1.0 | v1.0 | v1.0 | v1.0 | v1.0 | v1.0 | Minimal I/O | Minimal I/O | Minimal I/O | Minimal I/O | Minimal I/O | Minimal I/O
bPlace: www.SPCoast.com | www.SPCoast.com | www.SPCoast.com | www.SPCoast.com | www.SPCoast.com | www.SPCoast.com | Model RR fun! | Made in PCR, Coast, NMRA | Model RR fun! | Made in PCR, Coast, NMRA | Model RR fun! | Made in PCR, Coast, NMRA | Model RR fun! | Made in PCR, Coast, NMRA | Model RR fun! | Made in PCR, Coast, NMRA | Model RR fun! | Made in PCR, Coast, NMRA | John Plocher | 2020.09 | John Plocher | 2020.09 | John Plocher | 2020.09 | John Plocher | 2020.09 | John Plocher | 2020.09 | John Plocher | 2020.09 | www.SPCoast.com | www.SPCoast.com | www.SPCoast.com | www.SPCoast.com | www.SPCoast.com | www.SPCoast.com | Model RR fun! | Made in PCR, Coast, NMRA | Model RR fun! | Made in PCR, Coast, NMRA | Model RR fun! | Made in PCR, Coast, NMRA | Model RR fun! | Made in PCR, Coast, NMRA | Model RR fun! | Made in PCR, Coast, NMRA | Model RR fun! | Made in PCR, Coast, NMRA | John Plocher | 2020.09 | John Plocher | 2020.09 | John Plocher | 2020.09 | John Plocher | 2020.09 | John Plocher | 2020.09 | John Plocher | 2020.09 | www.SPCoast.com | www.SPCoast.com | www.SPCoast.com | www.SPCoast.com | www.SPCoast.com | www.SPCoast.com | Model RR fun! | Made in PCR, Coast, NMRA | Model RR fun! | Made in PCR, Coast, NMRA | Model RR fun! | Made in PCR, Coast, NMRA | Model RR fun! | Made in PCR, Coast, NMRA | Model RR fun! | Made in PCR, Coast, NMRA | Model RR fun! | Made in PCR, Coast, NMRA | John Plocher | 2020.09 | John Plocher | 2020.09 | John Plocher | 2020.09 | John Plocher | 2020.09 | John Plocher | 2020.09 | John Plocher | 2020.09 | www.SPCoast.com | www.SPCoast.com | www.SPCoast.com | www.SPCoast.com | www.SPCoast.com | www.SPCoast.com | Model RR fun! | Made in PCR, Coast, NMRA | Model RR fun! | Made in PCR, Coast, NMRA | Model RR fun! | Made in PCR, Coast, NMRA | Model RR fun! | Made in PCR, Coast, NMRA | Model RR fun! | Made in PCR, Coast, NMRA | Model RR fun! | Made in PCR, Coast, NMRA | John Plocher | 2020.09 | John Plocher | 2020.09 | John Plocher | 2020.09 | John Plocher | 2020.09 | John Plocher | 2020.09 | John Plocher | 2020.09 | www.SPCoast.com | www.SPCoast.com | www.SPCoast.com | www.SPCoast.com | www.SPCoast.com | www.SPCoast.com | Model RR fun! | Made in PCR, Coast, NMRA | Model RR fun! | Made in PCR, Coast, NMRA | Model RR fun! | Made in PCR, Coast, NMRA | Model RR fun! | Made in PCR, Coast, NMRA | Model RR fun! | Made in PCR, Coast, NMRA | Model RR fun! | Made in PCR, Coast, NMRA | John Plocher | 2020.09 | John Plocher | 2020.09 | John Plocher | 2020.09 | John Plocher | 2020.09 | John Plocher | 2020.09 | John Plocher | 2020.09 | www.SPCoast.com | www.SPCoast.com | www.SPCoast.com | www.SPCoast.com | www.SPCoast.com | www.SPCoast.com | Model RR fun! | Made in PCR, Coast, NMRA | Model RR fun! | Made in PCR, Coast, NMRA | Model RR fun! | Made in PCR, Coast, NMRA | Model RR fun! | Made in PCR, Coast, NMRA | Model RR fun! | Made in PCR, Coast, NMRA | Model RR fun! | Made in PCR, Coast, NMRA | John Plocher | 2020.09 | John Plocher | 2020.09 | John Plocher | 2020.09 | John Plocher | 2020.09 | John Plocher | 2020.09 | John Plocher | 2020.09 | www.SPCoast.com | www.SPCoast.com | www.SPCoast.com | www.SPCoast.com | www.SPCoast.com | www.SPCoast.com | Model RR fun! | Made in PCR, Coast, NMRA | Model RR fun! | Made in PCR, Coast, NMRA | Model RR fun! | Made in PCR, Coast, NMRA | Model RR fun! | Made in PCR, Coast, NMRA | Model RR fun! | Made in PCR, Coast, NMRA | Model RR fun! | Made in PCR, Coast, NMRA | John Plocher | 2020.09 | John Plocher | 2020.09 | John Plocher | 2020.09 | John Plocher | 2020.09 | John Plocher | 2020.09 | John Plocher | 2020.09 | www.SPCoast.com | www.SPCoast.com | www.SPCoast.com | www.SPCoast.com | www.SPCoast.com | www.SPCoast.com | Model RR fun! | Made in PCR, Coast, NMRA | Model RR fun! | Made in PCR, Coast, NMRA | Model RR fun! | Made in PCR, Coast, NMRA | Model RR fun! | Made in PCR, Coast, NMRA | Model RR fun! | Made in PCR, Coast, NMRA | Model RR fun! | Made in PCR, Coast, NMRA | John Plocher | 2020.09 | John Plocher | 2020.09 | John Plocher | 2020.09 | John Plocher | 2020.09 | John Plocher | 2020.09 | John Plocher | 2020.09 | www.SPCoast.com | www.SPCoast.com | www.SPCoast.com | www.SPCoast.com | www.SPCoast.com | www.SPCoast.com | Model RR fun! | Made in PCR, Coast, NMRA | Model RR fun! | Made in PCR, Coast, NMRA | Model RR fun! | Made in PCR, Coast, NMRA | Model RR fun! | Made in PCR, Coast, NMRA | Model RR fun! | Made in PCR, Coast, NMRA | Model RR fun! | Made in PCR, Coast, NMRA | John Plocher | 2020.09 | John Plocher | 2020.09 | John Plocher | 2020.09 | John Plocher | 2020.09 | John Plocher | 2020.09 | John Plocher | 2020.09 | www.SPCoast.com | www.SPCoast.com | www.SPCoast.com | www.SPCoast.com | www.SPCoast.com | www.SPCoast.com | Model RR fun! | Made in PCR, Coast, NMRA | Model RR fun! | Made in PCR, Coast, NMRA | Model RR fun! | Made in PCR, Coast, NMRA | Model RR fun! | Made in PCR, Coast, NMRA | Model RR fun! | Made in PCR, Coast, NMRA | Model RR fun! | Made in PCR, Coast, NMRA | John Plocher | 2020.09 | John Plocher | 2020.09 | John Plocher | 2020.09 | John Plocher | 2020.09 | John Plocher | 2020.09 | John Plocher | 2020.09
Milling: V-Score | V-Score | V-Score | V-Score | V-Score | V-Score | V-Score | V-Score | V-Score | V-Score | V-Score | V-Score | V-Score | V-Score
Document: Yellow | Yellow | Yellow | Yellow | Yellow | Yellow | Yellow | Yellow | Yellow | Yellow | Yellow | Yellow | Yellow | Yellow | Yellow | Yellow | Yellow | Yellow | Yellow | Yellow | Yellow | Yellow | Yellow | Yellow | Yellow | Yellow | Yellow | Yellow | Yellow | Yellow | Yellow | Yellow | Yellow | Yellow | Yellow | Yellow | Yellow | Yellow | Yellow | Yellow | Yellow | Yellow | Yellow | Yellow | Yellow | Yellow | Yellow | Yellow | Yellow | Yellow | Yellow | Yellow | Yellow | Yellow | Yellow | Yellow | Yellow | Yellow | Yellow | Yellow
_tNames: JP1 | JP1 | JP1 | JP1 | JP1 | JP1 | JP1 | JP1 | JP1 | JP1 | JP1 | JP1 | JP1 | JP1 | JP1 | JP1 | JP1 | JP1 | JP1 | JP1 | JP1 | JP1 | JP1 | JP1 | JP1 | JP1 | JP1 | JP1 | JP1 | JP1 | JP1 | JP1 | JP1 | JP1 | JP1 | JP1 | JP1 | JP1 | JP1 | JP1 | JP1 | JP1 | JP1 | JP1 | JP1 | JP1 | JP1 | JP1 | JP1 | JP1 | JP1 | JP1 | JP1 | JP1 | JP1 | JP1 | JP1 | JP1 | JP1 | JP1